# Altium PCB Main Board.PcbDoc (part 2 of 2)
Units mm, origin at the board's own origin, x right, y up, seen from the top; angles counter-clockwise.
Board outline 54.5 x 80 mm, 2 copper layers (Top Layer, Bottom Layer), stack 1.671 mm thick; 106 components, 102 nets, 471 pads, 251 vias.
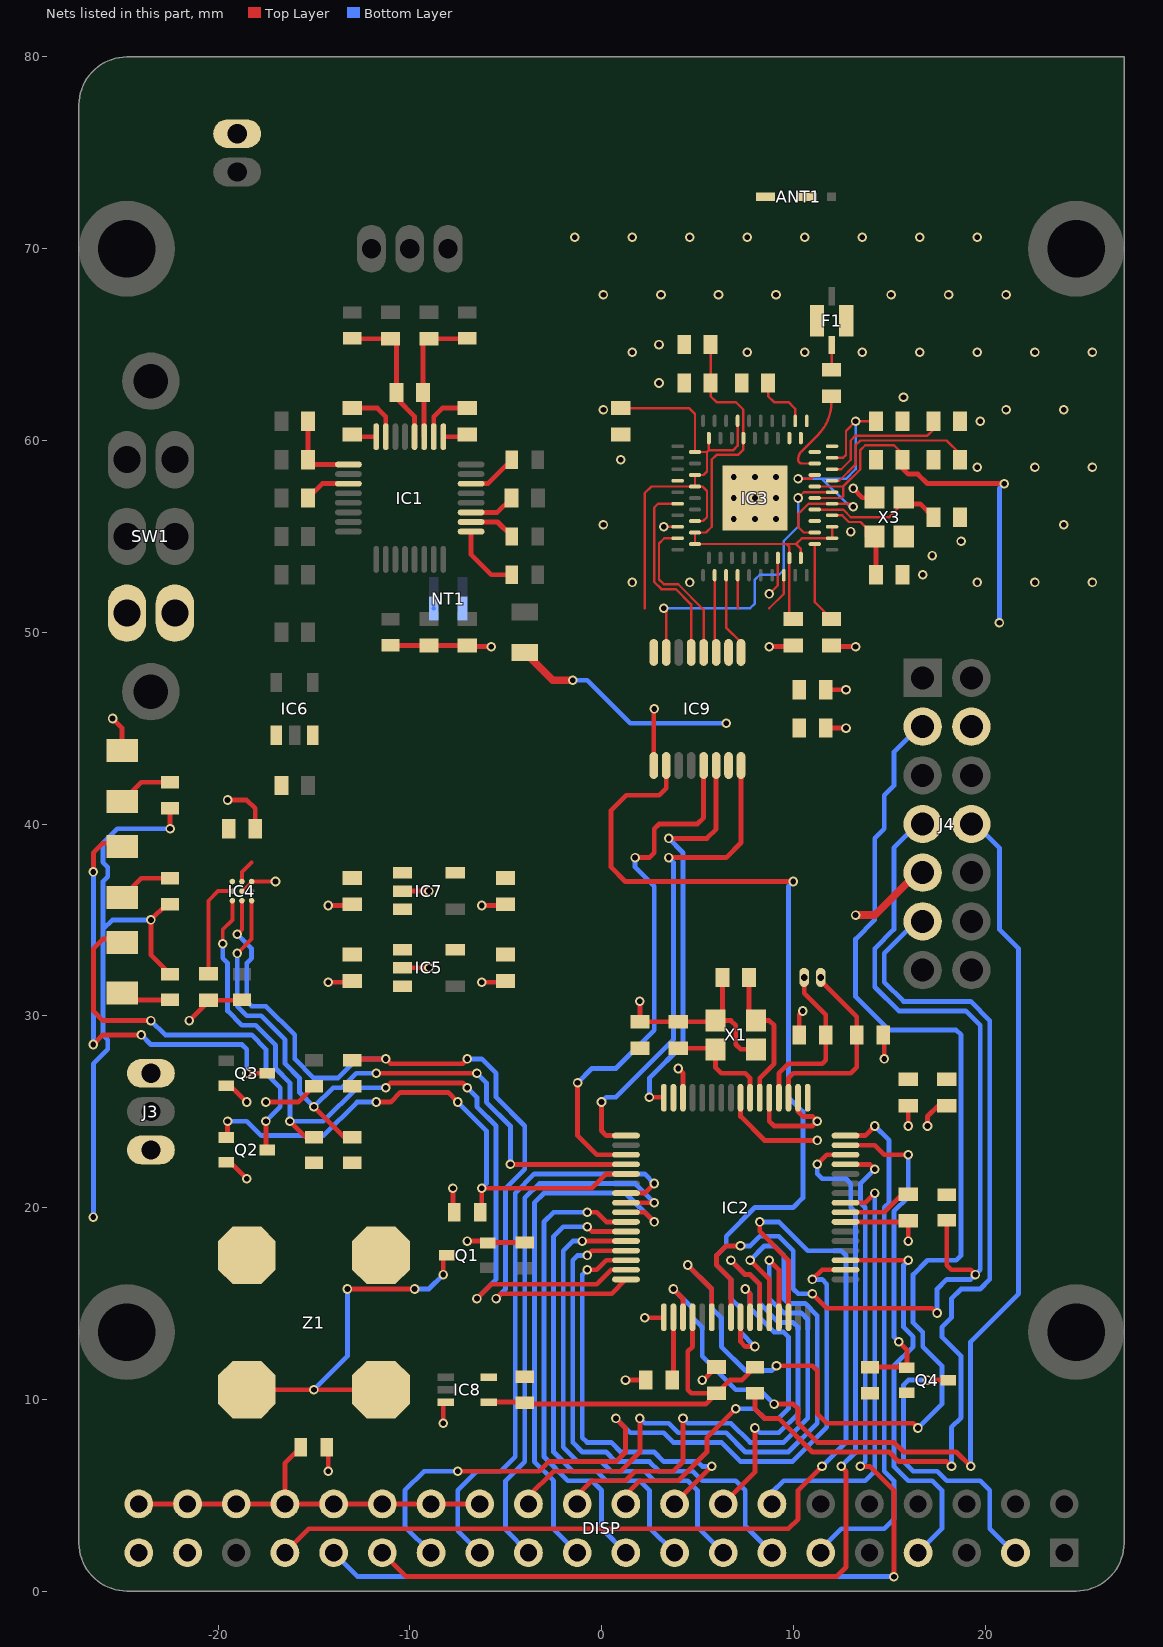
[diagram p2: the nets of this part, all layers, seen from the top]

## Via types
v1: diameter 0.5, hole 0.3, Top Layer to Bottom Layer, 215 vias
v2: diameter 0.5, hole 0.3, Top Layer to Bottom Layer, tented both sides, 36 vias

## Nets (pads, with @x,y where several pads share a name; then routed paths per layer and width w, separated by ;. In a path a pad name is that pad's centre, name@x,y a point inside that pad or via, vN(x,y) a via of type N, cw(c..) or ccw(c..) an arc to the next point about the centre after c; other vN are vias at no path point) (continued)
DGND: ANT1.2 C11.1 C13.1 C14.1 C15.1 C16.1 C17.1 C18.1 C19.1 C20.2 C21.1 C22.2 C23.1 C24.1 C25.1 C26.1 C27.1 C28.1 C29.1 C30.1 C31.1 C32.1 C33.1 C34.1 C35.1 C36.1 C37.1 C39.1 C40.1 C41.1 C43.1 C44.1 C46.1 D1.2 DISP.20 F1.1 F1.3 IC2.17 IC2.39 IC2.50 IC2.53 IC2.56 IC2.62 IC3.A10 IC3.A11 IC3.A24 IC3.A28 IC3.B3 IC3.B9 IC3.B10 IC3.B11 IC3.B34 IC3.Pad IC4.B2 IC4.C1 IC5.2 IC7.2 IC8.3 IC9.9 J2.1 J3.3 J4.9 NT1.2 Q1.2 Q2.2 Q3.2 R6.1 R9.1 R10.1 R12.2 R13.1 R17.1 X1.2 X1.4 X3.2 X3.4 | length 88.6
  Top Layer w0.125: IC4.B2@-18.75,36.5 IC4.C1@-18.25,37 ; v1(3.25,55.5) IC3.A28@3.975,55.5 ; v1(8.75,52) 9.2,52.45 IC3.B34@9.2,53.875 ; C27.1@18.69,56 C27.1@18.75,55.94
  Top Layer w0.2: IC4.C1@-18.25,37 v1(-17,37)
  Top Layer w0.25: v1(-25.5,45.5) -25,45 D1.2@-25,43.825 ; v1(-21.5,29.75) C39.1@-20.44,30.81 ; C39.1@-20.5,30.81 C39.1@-20.44,30.81 ; Q2.2@-19.575,22.35 -19.35,22.35 v1(-18.5,21.5) ; Q3.2@-19.575,26.35 -19.35,26.35 v1(-18.5,25.5) ; v1(-19.5,41.25) -18.5,41.25 -18.06,40.81 C40.1@-18.06,39.75 ; R13.1@-18.75,30.825 -18.765,30.81 C39.1@-20.44,30.81 ; v1(-17.5,25.5) -15.825,25.5 R17.1@-15,26.325 ; R12.2@-14.325,7.5 -14.25,7.425 v1(-14.25,6.25) ; v1(-14.25,31.75) -13.06,31.75 C41.1@-13,31.81 ; v1(-14.25,35.75) -13.06,35.75 C43.1@-13,35.81 ; R6.1@-11,49.31 C13.1@-9,49.31 C11.1@-7,49.31 -7,49.25 v1(-5.75,49.25) ; IC5.2@-10.375,32.5 v1(-9,32.5) ; IC7.2@-10.375,36.5 v1(-9,36.5) ; v1(-8.25,8.75) -8.25,9.725 IC8.3@-8.125,9.85 ; v1(-7.75,21) -7.75,19.825 R10.1@-7.675,19.75 ; v1(-7,18.25) -6.025,18.25 Q1.2@-5.925,18.15 ; v1(-6.25,31.75) -5.06,31.75 C44.1@-5,31.81 ; v1(-6.25,35.75) -5.06,35.75 C46.1@-5,35.81 ; Q1.2@-6,18.275 -5.9,18.175 R9.1@-4,18.175 ; v1(1.25,11) C15.1@2.31,11 ; v1(2,30.75) C17.1@2,29.69 C23.1@4,29.69 X1.2@5.89,29.69 ; v1(2.25,14.25) 3.25,14.25 IC2.17@3.25,14.275 ; v1(2.75,46) 2.725,45.975 IC9.9@2.725,43.05 IC9.9@2.775,43 ; v1(4,27.25) 4.25,27 IC2.62@4.25,25.725 ; C29.1@4.25,63.06 C29.1@4.31,63 ; v1(5.25,11) 5.31,11 C19.1@6,11.69 C19.1@6.31,11.69 ; X1.2@5.95,29.75 6.75,29.75 7,29.5 7,28.5 7.25,28.25 X1.4@8.05,28.25 ; X1.2@6.31,30.11 C21.1@6.31,32 ; IC2.56@7.25,25.725 7.25,24.75 8.5,23.5 v1(11.25,23.5) ; IC2.53@8.75,25.725 8.75,24.5 9,24.25 11,24.25 v1(11.25,24.5) 11,24.75 10.5,24.75 10.25,25 IC2.50@10.25,25.725 ; v1(8.75,49.25) 9.94,49.25 C30.1@10,49.31 ; C20.2@10.25,29.06 C20.2@10.31,29 10.31,30.06 v1(10.5,30.25) ; C24.1@11.69,45 v1(12.75,45) ; C25.1@11.69,47 v1(12.75,47) ; C37.1@12,49.31 12.06,49.25 v1(13.25,49.25) ; IC2.39@12.725,19.25 C16.1@15.94,19.25 ; v1(13.125,57.5) 13.609,57.016 X3.4@14.238,57.016 ; C32.1@14.25,58.94 C32.1@14.31,59 ; C22.2@14.69,29 14.75,28.94 v1(14.75,27.75) ; C31.1@15.69,60.81 C31.1@15.69,61 C31.1@15.75,61.06 ; X3.2@15.762,54.984 X3.2@15.766,54.984 ; v1(16,18.25) C16.1@16,19.25 ; v1(16,24.25) C14.1@16,25.31 ; J4.9@16.46,37.46 J4.9@16.75,37.46 ; v1(17,24.25) 17,24.75 17.56,25.31 C18.1@18,25.31 ; C35.1@17.25,58.94 C35.1@17.31,59
  Top Layer w0.4: v1(13.25,35.25) 14.25,35.25 J4.9@16.46,37.46
  Top Layer w0.5: R6.1@-11,49.31 R6.1@-11,49.325
  other v1: 16.75,53 17.25,54 18.75,54.75 13,55.25 6.9,55.9 8,55.9 9.1,55.9 6.9,57 8,57 9.1,57 6.9,58.1 8,58.1 9.1,58.1 1,59 19.75,61 15.75,62.25 3,63 3,65
  other v2: 1.6,52.6 4.6,52.6 19.6,52.6 22.6,52.6 25.6,52.6 0.1,55.6 24.1,55.6 19.6,58.6 22.6,58.6 25.6,58.6 0.1,61.6 21.1,61.6 24.1,61.6 1.6,64.6 7.6,64.6 10.6,64.6 13.6,64.6 16.6,64.6 19.6,64.6 22.6,64.6 25.6,64.6 0.1,67.6 3.1,67.6 6.1,67.6 9.1,67.6 15.1,67.6 18.1,67.6 21.1,67.6 -1.4,70.6 1.6,70.6 4.6,70.6 7.6,70.6 10.6,70.6 13.6,70.6 16.6,70.6 19.6,70.6
DISP_CS: DISP.6 IC2.48 | length 27.5
  Top Layer w0.25: IC2.48@12.725,23.75 13.75,23.75 v1(14.25,24.25)
  Bottom Layer w0.25: DISP.6@11.43,2 11.43,2.18 12.5,3.25 14.75,3.25 15.25,3.75 15.25,5.75 14.75,6.25 14.75,20 15,20.25 15,23.5 v1(14.25,24.25)
DISP_DB8: DISP.14 IC2.34 | length 41
  Top Layer w0.25: v1(-7.5,6.25) -3.25,6.25 -2.75,6.75 0.75,6.75 1.25,7.25 1.25,8.5 v1(0.75,9) ; v1(11,16.25) 11.5,16.75 IC2.34@12.725,16.75
  Bottom Layer w0.25: DISP.14@-8.89,2 -10.25,3.36 -10.25,5.25 -9.25,6.25 v1(-7.5,6.25) ; v1(0.75,9) 1.5,8.25 3.25,8.25 3.75,7.75 6.25,7.75 7.25,6.75 9.957,6.75 11.75,8.543 11.75,16 11.5,16.25 v1(11,16.25)
DISP_DB9: DISP.13 IC2.7 | length 30.8
  Top Layer w0.25: IC2.7@1.275,20.75 2.25,20.75 v1(2.75,21.25)
  Bottom Layer w0.25: DISP.13@-6.35,2 -7.5,3.15 -7.5,5.25 -6.5,6.25 -5.25,6.25 -4.5,7 -4.5,20.75 -3.5,21.75 2.25,21.75 v1(2.75,21.25)
DISP_DB10: DISP.12 IC2.8 | length 28.4
  Top Layer w0.25: IC2.8@1.275,20.25 v1(2.75,20.25)
  Bottom Layer w0.25: DISP.12@-3.81,2 -5,3.19 -5,5.75 -4,6.75 -4,20.5 -3.25,21.25 1.75,21.25 v1(2.75,20.25)
DISP_DB11: DISP.11 IC2.9 | length 27.9
  Top Layer w0.25: IC2.9@1.275,19.75 2.25,19.75 v1(2.75,19.25)
  Bottom Layer w0.25: DISP.11@-1.27,2 -2.5,3.23 -2.5,5.75 -3.5,6.75 -3.5,20.25 -3,20.75 1.25,20.75 v1(2.75,19.25)
DISP_DB12: DISP.10 IC2.10 | length 24.7
  Top Layer w0.25: v1(-0.75,19.75) -0.25,19.75 0.25,19.25 IC2.10@1.275,19.25 IC2.10@1.525,19.25
  Bottom Layer w0.25: v1(-0.75,19.75) -2.5,19.75 -3,19.25 -3,7 -1.75,5.75 -0.5,5.75 0,5.25 0,3.27 DISP.10@1.27,2
DISP_DB13: DISP.9 IC2.11 | length 25
  Top Layer w0.25: v1(-0.75,19) -0.5,18.75 IC2.11@1.275,18.75
  Bottom Layer w0.25: v1(-0.75,19) -2,19 -2.5,18.5 -2.5,7.25 -1.5,6.25 -0.25,6.25 0.25,5.75 2,5.75 2.5,5.25 2.5,3.31 DISP.9@3.81,2
DISP_DB14: DISP.8 IC2.12 | length 25.5
  Top Layer w0.25: v1(-1,18.25) IC2.12@1.275,18.25
  Bottom Layer w0.25: v1(-1,18.25) -1.5,18.25 -2,17.75 -2,7.5 -1.25,6.75 0,6.75 0.5,6.25 2.25,6.25 2.75,5.75 4.5,5.75 5,5.25 5,3.35 DISP.8@6.35,2
DISP_DB15: DISP.7 IC2.13 | length 26.3
  Top Layer w0.25: v1(-0.75,17.5) -0.5,17.75 IC2.13@1.275,17.75
  Bottom Layer w0.25: v1(-0.75,17.5) -1.25,17.5 -1.5,17.25 -1.5,7.75 -1,7.25 0.25,7.25 0.75,6.75 2.5,6.75 3,6.25 4.75,6.25 5.25,5.75 7,5.75 7.5,5.25 7.5,3.39 DISP.7@8.89,2
DISP_RD: DISP.15 IC2.46 | length 49.6
  Top Layer w0.25: DISP.15@-11.43,2 -10.18,0.75 12.25,0.75 12.75,1.25 12.75,6.25 v1(12.5,6.5) ; v1(11.25,22.25) 11.75,22.75 IC2.46@12.725,22.75
  Bottom Layer w0.25: v1(11.25,22.25) 11.25,21.75 11.5,21.5 12.75,21.5 13,21.25 13,20 13.25,19.75 13.25,7.25 v1(12.5,6.5)
DISP_RESET: DISP.4 IC2.35 | length 21.7
  Top Layer w0.25: IC2.35@12.725,17.25 v1(16,17.25)
  Bottom Layer w0.25: v1(16,17.25) 15.75,17 15.75,13.75 16.25,13.25 16.25,12.75 15.25,11.75 15.25,6.5 16,5.75 17.25,5.75 17.75,5.25 17.75,3.25 16.76,2.26 16.51,2.26 DISP.4@16.51,2
DISP_RS: DISP.17 IC2.30 | length 53.1
  Top Layer w0.25: DISP.17@-16.51,2 -15.26,3.25 9.75,3.25 10.25,3.75 10.25,5.25 v1(11.5,6.5) ; v1(8.25,19.25) 8.25,18.75 9.75,17.25 IC2.30@9.75,14.275
  Bottom Layer w0.25: v1(8.25,19.25) 9.25,19.25 10.75,17.75 12.5,17.75 12.75,17.5 12.75,7.75 v1(11.5,6.5)
DISP_SLEEP: IC2.47 Q4.1 R8.1 | length 17.1
  Top Layer w0.25: IC2.47@12.725,23.25 14.25,23.25 ; R8.1@14,11.675 Q4.1@15.9,11.675 ; 14.25,23.25 14.75,22.75 v1(16,22.75) ; v1(15.5,13) 15.925,12.575 Q4.1@15.925,11.65
  Bottom Layer w0.25: v1(15.5,13) 15.25,13.25 15.25,19.793 16,20.543 v1(16,22.75)
DISP_T_BUSY: DISP.32 IC2.14 | length 21.3
  Top Layer w0.25: v1(-0.75,16.75) -0.25,16.75 0.25,17.25 IC2.14@1.275,17.25 ; DISP.32@3.81,4.56 DISP.32@3.81,5.06 ; DISP.32@4.06,4.81 v1(5.75,6.5)
  Bottom Layer w0.25: v1(-0.75,16.75) -1,16.5 -1,8 -0.75,7.75 0.5,7.75 1,7.25 2.75,7.25 3.25,6.75 5,6.75 5.25,6.5 v1(5.75,6.5)
DISP_T_CLK: DISP.29 IC2.28 | length 35.2
  Top Layer w0.25: DISP.29@-3.81,4.54 -3.81,4.94 -2.5,6.25 1,6.25 2,7.25 v1(2,9) ; v1(7.75,17.25) 8.75,16.25 IC2.28@8.75,14.275
  Bottom Layer w0.25: v1(2,9) 2.25,8.75 3.5,8.75 4,8.25 6.5,8.25 7.5,7.25 9.75,7.25 11.25,8.75 11.25,14.366 10.616,15 9.75,15 9.5,15.25 9.5,17.5 9,18 8.5,18 v1(7.75,17.25)
DISP_T_CS: DISP.30 IC2.29 | length 29.2
  Top Layer w0.25: DISP.30@-1.21,4.54 -1.21,5.04 -0.5,5.75 1.25,5.75 1.75,6.25 3.75,6.25 4.25,6.75 v1(4.25,9) ; v1(8.75,17.25) 9.25,16.75 IC2.29@9.25,14.275
  Bottom Layer w0.25: v1(4.25,9) 4.5,8.75 6.75,8.75 7.75,7.75 9.5,7.75 10.75,9 10.75,14.159 10.409,14.5 9.5,14.5 8.75,15.25 v1(8.75,17.25)
DISP_T_DIN: DISP.31 IC2.26 | length 20.7
  Top Layer w0.25: DISP.31@1.29,4.54 1.29,5.04 2,5.75 4,5.75 5.5,7.25 5.5,8 v1(7,9.5) ; v1(7.5,15.75) 7.75,15.5 IC2.26@7.75,14.275
  Bottom Layer w0.25: v1(7,9.5) 8,9.5 8.5,9 9.25,9 9.75,9.5 9.75,13.25 9.5,13.5 9,13.5 7.75,14.75 7.75,15.5 v1(7.5,15.75)
DISP_T_DOUT: DISP.33 IC2.27 | length 21.2
  Top Layer w0.25: DISP.33@6.35,4.54 8,6.19 v1(8,8.5) ; v1(6.75,17.25) 7.5,16.5 7.75,16.5 8.25,16 IC2.27@8.25,14.275
  Bottom Layer w0.25: v1(6.75,17.25) 7.5,16.5 7.75,16.5 8.25,16 8.25,15 9.25,14 10,14 10.25,13.75 10.25,9.25 9.25,8.25 8.25,8.25 v1(8,8.5)
DISP_T_INT: DISP.34 IC2.41 | length 22.7
  Top Layer w0.25: IC2.41@12.725,20.25 13.75,20.25 v1(14.25,20.75)
  Bottom Layer w0.25: DISP.34@8.89,4.54 8.89,5.14 9.5,5.75 13.75,5.75 14.25,6.25 v1(14.25,20.75)
DISP_WR: DISP.16 IC2.45 | length 54.2
  Top Layer w0.25: IC2.45@12.725,22.25 14,22.25 v1(14.25,22) ; v1(13.5,6.5) 14,6.5 15.25,5.25 v1(15.25,0.75)
  Bottom Layer w0.25: DISP.16@-13.97,2 -12.72,0.75 v1(15.25,0.75) ; v1(13.5,6.5) 13.75,6.75 13.75,20 13.5,20.25 13.5,21.25 v1(14.25,22)
DVDD: C14.2 C15.2 C16.2 C17.2 C18.2 C24.2 C32.2 C44.2 DISP.19 FB1.1 IC2.18 IC2.40 IC2.49 IC2.63 IC3.B5 IC3.B6 IC5.5 IC8.5 IC9.15 J4.4 Q4.2 R8.2 R11.2 R14.2 R15.2 R16.2 R18.2 R19.2 R20.2 R21.2 Z1.1 | length 73.2
  Top Layer w0.125: IC3.B5@11.125,57 12.5,57 12.6,57.1 12.6,57.6 ; IC3.B6@11.125,57.6 12.6,57.6 ; C32.2@15.69,59 15.69,59.31 15.25,59.75 13.75,59.75 13.5,59.5 13.5,58.5 12.6,57.6
  Top Layer w0.25: R21.2@-22.5,32.175 -23.5,33.175 v1(-23.5,35) -22.675,35.825 R20.2@-22.5,35.825 ; v1(-22.5,39.75) R19.2@-22.5,40.825 ; C15.2@3.75,11.06 IC2.18@3.75,14.275 ; IC2.40@12.725,19.75 14.75,19.75 15.69,20.69 C16.2@16,20.69 ; C32.2@15.69,59 15.69,58.56 16,58.25 16.5,58.25 17,57.75 v1(21,57.75)
  Top Layer w0.4: FB1.1@-4,48.95 -2.55,47.5 v1(-1.5,47.5)
  Bottom Layer w0.25: v1(-26.5,19.5) -26.5,27.5 -25.75,28.25 -25.75,28.75 -26,29 -26,34.5 ; v1(-23.5,35) -25.5,35 -26,34.5 ; v1(-22.5,39.75) -25.25,39.75 -26,39 -26,38 -25.75,37.75 -25.75,37.25 -26,37 -26,34.5 ; v1(-1.5,47.5) -0.75,47.5 1.5,45.25 v1(6.5,45.25) ; v1(20.75,50.5) 20.75,57.5 v1(21,57.75)
GPOUT: IC2.4 IC4.A1 R16.1 | length 36.4
  Top Layer w0.2: v1(-19,33.25) -18.25,34 IC4.A1@-18.25,36
  Top Layer w0.25: v1(-15,25.25) -13.425,23.675 R16.1@-13,23.675 ; v1(-11.75,27) v1(-6.5,27) ; v1(-4.75,22.25) IC2.4@1.275,22.25
  Bottom Layer w0.25: v1(-19,33.25) -19,30.5 -18.5,30 -17.75,30 -16.5,28.75 -16.5,27.5 -15.75,26.75 -15.75,26 v1(-15,25.25) -14,26.25 -13.543,26.25 -12.793,27 v1(-11.75,27) ; v1@-6.375,26.875 -6,26.5 -6,25.5 -4.75,24.25 v1(-4.75,22.25)
HFXIN: C23.2 IC2.55 X1.3 | length 5.9
  Top Layer w0.25: C23.2@4,28.31 X1.3@5.89,28.31 ; X1.3@5.95,28.25 5.95,27.3 6.25,27 7.5,27 7.75,26.75 IC2.55@7.75,25.725
HFXOUT: C21.2 IC2.54 X1.1 | length 7.5
  Top Layer w0.25: C21.2@7.69,32 7.69,30.11 X1.1@8.05,29.75 8.75,29.75 9,29.5 9,27.5 8.25,26.75 IC2.54@8.25,25.725
JTAG_RST: J4.11 R7.1 | length 48.3
  Top Layer w0.25: R7.1@8,10.25 8,9.5 8.5,9 9.25,9 11,7.25 15,7.25 15.5,6.75 18,6.75 v1(18.25,6.5)
  Bottom Layer w0.25: J4.11@16.75,34.92 16.42,34.92 14.75,33.25 14.75,31.75 15.75,30.75 19.25,30.75 20.25,29.75 20.25,16.25 19.75,15.75 18.75,15.75 18.25,15.25 18.25,14.25 17.75,13.75 17.75,13.25 18.75,12.25 18.75,9.043 18.25,8.543 v1(18.25,6.5)
LED: IC2.5 Q2.1 R10.2 | length 28.7
  Top Layer w0.25: Q2.1@-19.575,23.65 -19.5,23.725 v1(-19.5,24.5) ; v1(-11.75,25.5) -11,25.5 -10.5,26 -8,26 v1(-7.5,25.5) ; R10.2@-6.325,19.75 -6.25,19.825 v1(-6.25,21) -0.5,21 0.25,21.75 IC2.5@1.275,21.75
  Bottom Layer w0.25: v1(-19.5,24.5) -18.5,24.5 -17.75,23.75 -14.5,23.75 -12.75,25.5 v1(-11.75,25.5) ; v1(-7.5,25.5) -6,24 -6,21.25 v1(-6.25,21)
LFXIN: C22.1 IC2.51 X2.1 | length 10.1
  Top Layer w0.25: IC2.51@9.75,25.725 9.75,26.75 10,27 13,27 13.31,27.31 C22.1@13.31,29 13.31,29.94 X2.1@11.432,31.818
LFXOUT: C20.1 IC2.52 X2.2 | length 8.8
  Top Layer w0.25: IC2.52@9.25,25.725 9.25,27 9.75,27.5 11.5,27.5 11.69,27.69 C20.1@11.69,29 11.69,30.06 10.568,31.182 X2.2@10.568,32
MR: C19.2 IC2.20 IC8.4 R7.2 R18.1 | length 20.1
  Top Layer w0.25: IC8.4@-5.875,9.85 R18.1@-4.025,9.85 ; R18.1@-4,9.75 5.44,9.75 C19.2@6,10.31 ; IC2.20@4.75,14.275 4.75,12.75 4.5,12.5 4.5,10.5 4.69,10.31 C19.2@6,10.31 ; R7.2@8,11.675 7.325,11 6.69,11 C19.2@6,10.31
NetC1_1: C1.1 C3.1 IC1.4 R2.2 | length 7.2
  Top Layer w0.25: R2.2@-12.985,65.31 C3.1@-11,65.31 ; C3.1@-10.69,65 -10.69,63 -10.69,62.19 -9.75,61.25 IC1.4@-9.75,60.2
  Top Layer w0.254: R2.2@-13,65.325 R2.2@-12.985,65.31
NetC1_2: C1.2 C2.2 IC1.3 R1.2 | length 6.7
  Top Layer w0.25: -9.31,63 C2.2@-9.31,65 ; IC1.3@-9.25,60.2 C1.2@-9.25,62.94 ; C2.2@-9,65.31 R1.2@-7.015,65.31
NetC4_1: C4.1 IC1.2 | length 3
  Top Layer w0.25: IC1.2@-8.75,60.2 -8.75,61.25 -8.31,61.69 C4.1@-7,61.69
NetC4_2: C4.2 IC1.1 | length 1.1
  Top Layer w0.25: IC1.1@-8.25,60.2 C4.2@-7.11,60.2
NetC5_1: C5.1 IC1.8 | length 1.1
  Top Layer w0.25: C5.1@-12.89,60.2 IC1.8@-11.75,60.2
NetC5_2: C5.2 IC1.7 | length 3
  Top Layer w0.25: C5.2@-13,61.69 -11.69,61.69 -11.25,61.25 IC1.7@-11.25,60.2
NetC6_2: C6.2 C7.2 IC1.9 | length 4.2
  Top Layer w0.25: C7.2@-15.31,61 C6.2@-15.31,59 -15.06,58.75 IC1.9@-13.2,58.75
NetC8_2: C8.2 IC1.27 | length 2.4
  Top Layer w0.25: IC1.27@-6.8,56.25 -5.44,56.25 C8.2@-4.69,57
NetC9_2: C9.2 IC1.11 | length 2.4
  Top Layer w0.25: C9.2@-15.31,57 -14.56,57.75 IC1.11@-13.2,57.75
NetC28_2: C28.2 C29.2 C30.2 IC3.A2 IC3.A3 IC3.B15 IC3.B26 IC3.B27 IC3.B35 IC3.B36 | length 26.2
  Top Layer w0.125: IC3.B26@4.875,55.2 IC3.B27@4.875,54.6 9.65,54.6 ; 5.2,55.2 5.45,55.2 5.75,55.5 5.75,59 6,59.25 7.125,59.25 7.4,59.525 IC3.B15@7.4,60.125 7.4,61.6 7,62 6,62 5.69,62.31 C29.2@5.69,63 C28.2@5.69,65 ; C30.2@10,50.69 9.8,50.89 IC3.B35@9.8,53.875 9.8,54.45 9.65,54.6 ; IC3.B36@10.4,53.875 10.4,54.35 10.15,54.6 ; IC3.A3@12.025,55.5 IC3.A2@12.025,54.9 10.45,54.9 10.15,54.6 ; 9.65,54.6 10.15,54.6
NetC31_2: C31.2 IC3.A5 IC3.A9 IC3.B2 IC3.B7 | length 17.5
  Top Layer w0.125: v1(10.25,58) 10.925,58 IC3.B7@11.125,58.2 ; IC3.B2@11.125,55.2 10.55,55.2 10.25,55.5 10.25,56.157 10.793,56.7 IC3.A5@12.025,56.7 12.975,56.7 v1(13.125,56.55) ; IC3.A9@12.025,59.1 12.6,59.1 12.748,59.248 12.748,60.498 v1(13.25,61) C31.2@14.31,61
  Bottom Layer w0.125: v1(10.25,58) 11.5,58 ; v1(13.125,56.55) 12.95,56.55 11.5,58 ; v1(13.25,61) 13.25,58.5 12.75,58 11.5,58
NetC34_2: C34.2 IC3.A12 | length 3
  Top Layer w0.125: C34.2@8.69,63 8.69,62.31 9,62 9.75,62 10.1,61.65 IC3.A12@10.1,61.025
NetC35_2: C35.2 IC3.A7 | length 8.4
  Top Layer w0.125: IC3.A7@12.025,57.9 12.4,57.9 13.25,58.75 13.25,59.75 13.5,60 18,60 C35.2@18.69,59.31
NetC36_2: C36.2 IC3.A8 | length 6.7
  Top Layer w0.127: IC3.A8@12.025,58.5 12.5,58.5 12.999,58.999 12.999,59.999 13.251,60.251 17.001,60.251 C36.2@17.31,60.56
NetC37_2: C37.2 IC3.B1 | length 4.2
  Top Layer w0.125: IC3.B1@11.125,54.525 11.125,51.565 C37.2@12,50.69
NetC38_2: C38.2 F1.4 | length 1.3
  Top Layer w0.125: C38.2@12,63.69 F1.4@12,64.98
NetC39_2: C39.2 IC4.B3 | length 5.3
  Top Layer w0.2: C39.2@-20.5,32.19 -20.5,36 -20,36.5 IC4.B3@-19.25,36.5
NetD1_1: D1.1 R19.1 | length 2.9
  Top Layer w0.25: D1.1@-25,41.175 -24,42.175 R19.1@-22.5,42.175
NetD2_1: D2.1 R20.1 | length 2.9
  Top Layer w0.25: D2.1@-25,36.175 -24,37.175 R20.1@-22.5,37.175
NetD2_2: D2.2 Q3.3 | length 22.6
  Top Layer w0.25: v1(-26.5,28.5) -26,29 v1(-24,29) ; v1(-26.5,37.5) -26.5,38.5 -26,39 -25.175,39 D2.2@-25,38.825 ; v1(-18.5,27) Q3.3@-17.425,27
  Bottom Layer w0.25: v1(-26.5,28.5) v1(-26.5,37.5) ; v1(-24,29) -23.5,28.5 -18.75,28.5 -18.5,28.25 v1(-18.5,27)
NetD3_1: D3.1 R21.1 | length 2.6
  Top Layer w0.25: D3.1@-25,31.175 -24.65,30.825 R21.1@-22.5,30.825
NetD3_2: D3.2 Q2.3 | length 20.8
  Top Layer w0.25: D3.2@-25,33.825 -25.175,34 -26,34 -26.5,33.5 -26.5,30.25 -26,29.75 v1(-23.5,29.75) ; v1(-17.5,24.5) -17.5,23.075 Q2.3@-17.425,23
  Bottom Layer w0.25: v1(-23.5,29.75) -22.75,29 -18.25,29 -17.5,28.25 -17.5,27 -16.75,26.25 -16.75,25.25 v1(-17.5,24.5)
NetDISP_2: DISP.2 Q4.3 | length 15.4
  Top Layer w0.25: v1(17,11) Q4.3@18.075,11
  Bottom Layer w0.25: v1(17,11) 16,11 15.75,10.75 15.75,6.75 16.25,6.25 17.5,6.25 18,5.75 19.75,5.75 20.25,5.25 20.25,3.25 21.5,2 DISP.2@21.59,2
NetDISP_21: DISP.21 DISP.22 DISP.23 DISP.24 DISP.25 DISP.26 DISP.27 DISP.28 R12.1 | length 21.1
  Top Layer w0.25: DISP.21@-24.13,4.54 DISP.22@-21.59,4.54 DISP.23@-19.05,4.54 DISP.24@-16.51,4.54 ; R12.1@-15.675,7.5 -16.51,6.665 DISP.24@-16.51,4.54 ; DISP.28@-6.35,4.54 DISP.27@-8.89,4.54 DISP.26@-11.43,4.54 DISP.25@-13.97,4.54 DISP.24@-16.51,4.54
NetIC1_25: IC1.25 R5.1 | length 3.8
  Top Layer w0.25: IC1.25@-6.8,55.25 -6.8,54.05 -5.75,53 R5.1@-4.675,53
NetIC1_26: IC1.26 R4.1 | length 2.4
  Top Layer w0.25: IC1.26@-6.8,55.75 -5.425,55.75 R4.1@-4.675,55
NetIC1_30: IC1.30 R3.1 | length 2.6
  Top Layer w0.25: IC1.30@-6.8,57.75 -5.925,57.75 R3.1@-4.675,59
NetIC3_A26: IC3.A26 IC9.5 | length 10.1
  Top Layer w0.125: IC3.A26@3.975,56.7 2.95,56.7 2.75,56.5 2.75,52.625 3.125,52.25 3.875,52.25 4.675,51.45 IC9.5@4.675,48.95
NetIC3_A29: IC3.A29 IC9.4 | length 8.2
  Top Layer w0.125: IC3.A29@3.975,54.9 3.275,54.9 3,54.625 3,52.75 3.25,52.5 4,52.5 5.325,51.175 IC9.4@5.325,48.95
NetIC3_A32: IC3.A32 IC9.3 | length 4.1
  Top Layer w0.125: IC3.A32@5.9,52.975 5.9,49.025 IC9.3@5.975,48.95
NetIC3_A33: IC3.A33 IC9.1 | length 4.3
  Top Layer w0.125: IC3.A33@6.5,52.975 6.5,50.25 7.275,49.475 IC9.1@7.275,48.95
NetQ1_3: Q1.3 Z1.2 | length 19.1
  Top Layer w0.25: Z1.2@-18.5,10.5 v1(-15,10.5) Z1.2@-11.5,10.5 ; v1(-13.25,15.75) v1(-9.75,15.75) ; v1(-8.25,16.5) Q1.3@-8.25,17.325
  Bottom Layer w0.25: v1(-15,10.5) -13.25,12.25 v1(-13.25,15.75) ; v1(-9.75,15.75) -9,15.75 v1(-8.25,16.5)
NSHUTD_DVDD: IC2.25 IC9.10 | length 48
  Top Layer w0.25: IC9.10@3.375,43.05 3.375,41.875 3,41.5 1.293,41.5 0.5,40.707 0.5,37.75 1.25,37 v1(10,37) ; IC2.25@7.25,14.275 7.25,13 7.5,12.75 v1(8,12.75)
  Bottom Layer w0.25: v1(8,12.75) 7.25,13.5 7.25,14.75 6.75,15.25 6.75,16.25 6,17 6,17.5 6.5,18 6.5,18.5 8,20 10,20 10.5,20.5 10.5,25 9.75,25.75 9.75,36.75 v1(10,37)
NSHUTD_RFVDD: IC3.A6 IC9.7 | length 16.4
  Top Layer w0.125: v1(3.25,51.25) 3.375,51.125 IC9.7@3.375,48.95 ; v1(10.25,57) 10.55,57.3 IC3.A6@12.025,57.3 IC3.A6@12.275,57.3
  Bottom Layer w0.125: v1(3.25,51.25) 7.75,51.25 8,51.5 8,52.75 8.25,53 9.25,53 9.5,53.25 9.5,54.75 10.25,55.5 v1(10.25,57)
PACK+: C40.2 IC4.C3 SW1.3 SW1.6
RF: C38.1 IC3.B8 | length 4.9
  Top Layer w0.125: IC3.B8@11.125,58.8 10.45,58.8 cw(c10.45,59) 10.25,59 cw(c10.854,59) 10.427,59.427 10.5,59.5 11.256,60.256 ccw(c9.46,62.052) 12,62.052 C38.1@12,62.31
RF_CLKM: C26.2 IC3.A4 X3.1 | length 4.7
  Top Layer w0.125: IC3.A4@12.025,56.1 12.546,56.1 12.896,55.75 13.5,55.75 13.766,55.484 X3.1@13.766,54.984 ; X3.1@14.016,54.984 X3.1@14.238,54.984 X3.1@14.31,54.912
  Top Layer w0.25: C26.2@14.31,53 X3.1@14.31,54.912
RF_CLKP: C27.2 IC3.B4 X3.3 | length 6.6
  Top Layer w0.125: IC3.B4@11.125,56.4 11.137,56.388 12.612,56.388 13,56 15,56 X3.3@15.762,56.762
  Top Layer w0.25: X3.3@16.088,56.69 16.62,56.69 C27.2@17.31,56
RFVDD: C25.2 C33.2 C46.2 IC3.A17 IC3.A34 IC3.A38 IC3.B18 IC3.B19 IC3.B21 IC3.B22 IC3.B25 IC7.5 IC9.2 IC9.8 | length 27.9
  Top Layer w0.125: C33.2@1,61.69 4.56,61.69 4.875,61.375 IC3.B19@4.875,59.4 5.475,59.4 5.5,59.375 ; 2.25,51.25 2.25,57.25 2.6,57.6 IC3.B22@4.875,57.6 ; IC3.B25@4.875,55.8 5.3,55.8 5.5,56 5.5,57.375 5.275,57.6 IC3.B22@4.875,57.6 ; IC3.B18@5.6,60.125 5.6,59.525 5.625,59.5 ; 7.1,51.25 IC3.A34@7.1,52.975 ; IC3.A17@7.1,61.025 7.1,59.725 6.875,59.5 5.625,59.5 ; 8.75,51.25 9.5,52 IC3.A38@9.5,52.975 ; IC3.B22@4.875,57.6 IC3.B21@4.875,58.2 5.325,58.2 5.5,58.375 5.5,59.375 ; 5.5,59.375 5.5,59.4 5.6,59.5 5.625,59.5
RTS: IC2.3 IC9.13 | length 28.1
  Top Layer w0.25: v1(-1.25,26.5) -1.25,23.75 -0.25,22.75 IC2.3@1.275,22.75 ; v1(1.75,38.25) 2.5,38.25 2.75,38.5 2.75,39.75 3,40 5,40 5.325,40.325 IC9.13@5.325,43.05
  Bottom Layer w0.25: v1(-1.25,26.5) -0.5,27.25 0.75,27.25 2.75,29.25 2.75,36.75 1.75,37.75 v1(1.75,38.25)
SCL: IC2.15 IC4.A3 R14.1 | length 45.8
  Top Layer w0.2: v1(-19.75,33.75) -19.75,34.5 -19.25,35 IC4.A3@-19.25,36
  Top Layer w0.25: v1(-16.25,24.5) -15.425,23.675 R14.1@-15,23.675 ; v1(-11.25,26.25) -11,26.5 -7.25,26.5 v1(-7,26.25) ; v1(-6.5,15.25) -5.75,16 -0.25,16 0.5,16.75 IC2.15@1.275,16.75
  Bottom Layer w0.25: v1(-19.75,33.75) -19.75,33 -19.5,32.75 -19.5,30.25 -18.75,29.5 -18.043,29.5 -17,28.457 -17,27.25 -16.25,26.5 v1(-16.25,24.5) -14.5,24.5 -12.75,26.25 v1(-11.25,26.25) ; v1(-7,26.25) -6.5,25.75 -6.5,25.25 -5.5,24.25 -5.5,16.25 v1(-6.5,15.25)
SDA: IC2.16 IC4.A2 R15.1 | length 44.1
  Top Layer w0.2: v1(-19,34.25) -18.75,34.5 IC4.A2@-18.75,36
  Top Layer w0.25: R15.1@-13,27.675 -12.925,27.75 v1(-11.25,27.75) -11,27.5 -7.25,27.5 v1(-7,27.75) ; v1(-5.5,15.25) -5.25,15.5 0.525,15.5 IC2.16@1.275,16.25
  Bottom Layer w0.25: v1(-19,34.25) -18.25,33.5 -18.25,33 -18.5,32.75 -18.5,30.75 -18.25,30.5 -17.5,30.5 -16,29 -16,27.75 -15,26.75 -13.75,26.75 -12.75,27.75 v1(-11.25,27.75) ; v1(-7,27.75) -6.25,27.75 -5.5,27 -5.5,25.75 -4,24.25 -4,22 -5,21 -5,15.75 v1(-5.5,15.25)
TCK: IC2.24 J4.7 R11.1 | length 55
  Top Layer w0.25: IC2.24@6.75,14.275 6.75,16.25 6,17 6,17.5 6.5,18 v1(7.25,18) ; v1(11,15.5) 11.75,14.75 17.25,14.75 v1(17.5,14.5) ; R11.1@18,19.325 18,17 18.25,16.75 19.25,16.75 v1(19.5,16.5)
  Bottom Layer w0.25: v1(7.25,18) 7.75,18 8.25,18.5 9.25,18.5 10,17.75 10,15.75 10.25,15.5 v1(11,15.5) ; J4.7@16.75,40 16.5,40 15.25,38.75 15.25,34.5 14.25,33.5 14.25,31.5 15.5,30.25 19,30.25 19.75,29.5 19.75,16.75 v1(19.5,16.5) 19.25,16.25 18,16.25 17.5,15.75 v1(17.5,14.5)
TDI: IC2.22 J4.3 | length 67.3
  Top Layer w0.25: v1(4.5,17) 5.75,15.75 IC2.22@5.75,14.275 ; v1(9.125,11.75) 11,11.75 11.25,11.5 11.25,9.25 11.75,8.75 16.25,8.75 v1(16.5,8.5)
  Bottom Layer w0.25: v1(4.5,17) 5.75,15.75 5.75,14.75 6.25,14.25 6.25,12.75 7.5,11.5 8.875,11.5 v1(9.125,11.75) ; v1(16.5,8.5) 17.75,9.75 17.75,11.75 16.75,12.75 16.75,13.5 16.25,14 16.25,16.5 17,17.25 18.5,17.25 18.75,17.5 18.75,29 18.5,29.25 15,29.25 13.25,31 13.25,34 14.25,35 14.25,39.25 14.75,39.75 14.75,41.5 15.25,42 15.25,43.75 16.58,45.08 J4.3@16.75,45.08
TEST: IC2.19 J4.8 | length 58.3
  Top Layer w0.25: v1(3.75,15.75) 4.25,15.25 IC2.19@4.25,14.275 ; v1(9,9.75) 10,9.75 10.25,9.5 10.25,8.75 11.25,7.75 15.25,7.75 15.75,7.25 18.5,7.25 v1(19.25,6.5)
  Bottom Layer w0.25: v1(3.75,15.75) 4.75,14.75 4.75,14.25 5.25,13.75 5.25,12.25 7,10.5 8.25,10.5 v1(9,9.75) ; v1(19.25,6.5) 19.25,13 21.75,15.5 21.75,33.5 20.75,34.5 20.75,38.75 19.5,40 J4.8@19.29,40
UART_RX: IC2.1 IC9.16 | length 25.7
  Top Layer w0.25: v1(0,25.5) 0,24 0.25,23.75 IC2.1@1.275,23.75 ; v1(3.5,38.25) 6.5,38.25 7.275,39.025 IC9.16@7.275,43.05
  Bottom Layer w0.25: v1(0,25.5) 0.25,25.75 0.75,25.75 3.75,28.75 3.75,38 v1(3.5,38.25)
UART_TX: IC2.64 IC9.14 | length 21.3
  Top Layer w0.25: v1(2.5,25.75) 3.225,25.75 IC2.64@3.25,25.725 ; v1(3.5,39.25) 5.5,39.25 5.975,39.725 IC9.14@5.975,43.05
  Bottom Layer w0.25: v1(2.5,25.75) 2.5,26.75 4.25,28.5 4.25,38.5 v1(3.5,39.25)
VBUS: C41.2 C42.2 C43.2 IC4.C2 IC5.1 IC5.3 IC6.1 IC6.3 IC7.1 IC7.3 J3.1 | length 1.2
  Top Layer w0.2: IC4.C2@-18.75,37 -18.75,37.5 -18.25,38
pads on no net: DISP.1 DISP.3 DISP.5 DISP.18 DISP.35 DISP.36 DISP.37 DISP.38 DISP.39 DISP.40 IC2.6 IC2.43 IC2.44 IC3.A1 IC3.A13 IC3.A14 IC3.A15 IC3.A16 IC3.A18 IC3.A19 IC3.A20 IC3.A21 IC3.A22 IC3.A23 IC3.A27 IC3.A30 IC3.A31 IC3.A35 IC3.A36 IC3.A37 IC3.A39 IC3.A40 IC3.B12 IC3.B13 IC3.B14 IC3.B16 IC3.B17 IC3.B20 IC3.B23 IC3.B24 IC3.B28 IC3.B29 IC3.B30 IC3.B31 IC3.B32 IC3.B33 IC5.4 IC6.4 IC7.4 IC8.1 IC8.2 J4.2 J4.6 J4.10 J4.13 SW1. SW1.1 SW1.4

## Polygon pours and split planes (outlines as drawn)
DGND on Bottom Layer "DGND" (solid, pour order 6): -27.25,2.5 ccw(c-24.75,2.5) -24.75,0 24.75,0 ccw(c24.75,2.5) 27.25,2.5 27.25,72.5 -1,72.5 -1,52.25 -1.75,51.5 -12.5,51.5 -13,51 -13,40.5 -13,40.25 -13.75,39.5 -18.25,39.5 -19,40.25 -19,65.75 -17.5,67.25 -15.5,69.25 -15.5,70.5 -15.5,72.25 -15,72.75 -14.75,73 -5.5,73 -5.25,73 -4.5,72.25 -4.5,69.25 -1,65.75 -1,80 -24.75,80 ccw(c-24.75,77.5) -27.25,77.5
AGND on Bottom Layer "AGND" (solid, pour order 5): -5.5,72.5 -5,72 -5,69 -1.5,65.5 -1.5,52.5 -2,52 -12.75,52 -13.5,51.25 -13.5,40.5 -14,40 -18,40 -18.5,40.5 -18.5,65.5 -15,69 -15,72 -14.5,72.5
AVDD on Top Layer "AVDD" (solid, pour order 4): -5.5,72.5 -5,72 -5,69 -1.5,65.5 -1.5,52.5 -2,52 -12.75,52 -13.5,51.25 -13.5,46.75 -14,46.25 -18,46.25 -18.5,46.75 -18.5,65.5 -15,69 -15,72 -14.5,72.5
BATT+ on Top Layer "BATT+" (solid, pour order 9): -15.5,80 -15.5,69.25 -19,65.75 -19,53.75 -19.5,53.25 -26.75,53.25 -27.25,53.75 -27.25,76.75 -27.25,77.5 cw(c-24.75,77.5) -24.75,80 -15.5,80
DGND on Top Layer "DGND" (solid, pour order 11): -4.5,72 -4.5,69.25 -1,65.75 -1,52.5 -0.5,52 27.25,52 27.25,72.5 -1,72.5 -4,72.5
VBUS on Top Layer "VBUS" (solid, pour order 13): -27.25,26.25 -9.75,26.25 -9.25,26.75 -9.25,38.5 -9.25,45.25 -9.75,45.75 -18,45.75 -18.5,45.25 -18.5,40.5 -18.5,35.25 -19.25,34.5 -27.25,34.5
PACK+ on Top Layer "PACK+" (solid, pour order 15): -27.25,35 -19.5,35 -19,35.5 -19,40.25 -19,52.25 -19.5,52.75 -26.75,52.75 -27.25,52.25
DVDD on Top Layer "DVDD" (solid, pour order 17): -27.25,25.75 -27.25,2.5 ccw(c-24.75,2.5) -24.75,0 0,0 24.75,0 ccw(c24.75,2.5) 27.25,2.5 27.25,51.5 15.5,51.5 15,51 15,46.75 14.25,46 5,46 4.5,45.5 4.5,35.25 3.75,34.5 -8.25,34.5 -8.75,34 -8.75,31.5 -8.75,26.5 -9.5,25.75
RFVDD on Top Layer "RFVDD" (solid, pour order 21): -8.25,35 3.5,35 4,35.5 4,45.75 4.75,46.5 14,46.5 14.5,47 14.5,51 14,51.5 -6.75,51.5 -12.5,51.5 -13,51 -13,46.75 -12.5,46.25 -9.5,46.25 -8.75,45.5 -8.75,37.5 -8.75,35.5

## Other copper
Top Layer:
  pour cut-out: -13.75,62.5 -6.25,62.5 -6.25,59.5 -8.05,59.5 -8.75,60.2 -11.25,60.2 -11.95,59.5 -13.75,59.5
Bottom Layer:
  pour cut-out: -13.75,62.5 -6.25,62.5 -6.25,59.5 -8.05,59.5 -8.75,60.2 -11.25,60.2 -11.95,59.5 -13.75,59.5

## Silkscreen, mask and mechanical layers (free items; w line width, h text height)
Top Overlay:
  lines w0.15: 16.25,59.75 16.5,60 16.5,62.35
  lines w0.25: 0,0 0,0.5
Bottom Overlay:
  lines w0.25: -22,70 -13,70 ; -7,70 -5,70 -4.25,70.75 -3.5,70 -2.75,70 -2.25,68.75 -2,70 -1.25,73.75 -0.346,69.231 ; -0.25,69.25 0.25,70 1,70 1.75,70.75 2.5,70 22,70
  text "PAD" at 20.75,71.75 h3
  text "Pacemaker Access Device" at 20.75,70.5 h1.33
  text "ECG Main Board" at 20.75,67.75 h2
  text "Texas Instruments Innovation Challenge 2015" at 24.181,17.5 h2 r270
  text "Samuel López" at -8.837,13.822 h1.75
  text "Tomás Valencia" at -7.248,11.825 h1.75
Mechanical 1:
  the board outline again, w0.25